# EAGLE board Hot_Plate (EAGLE 5.11)
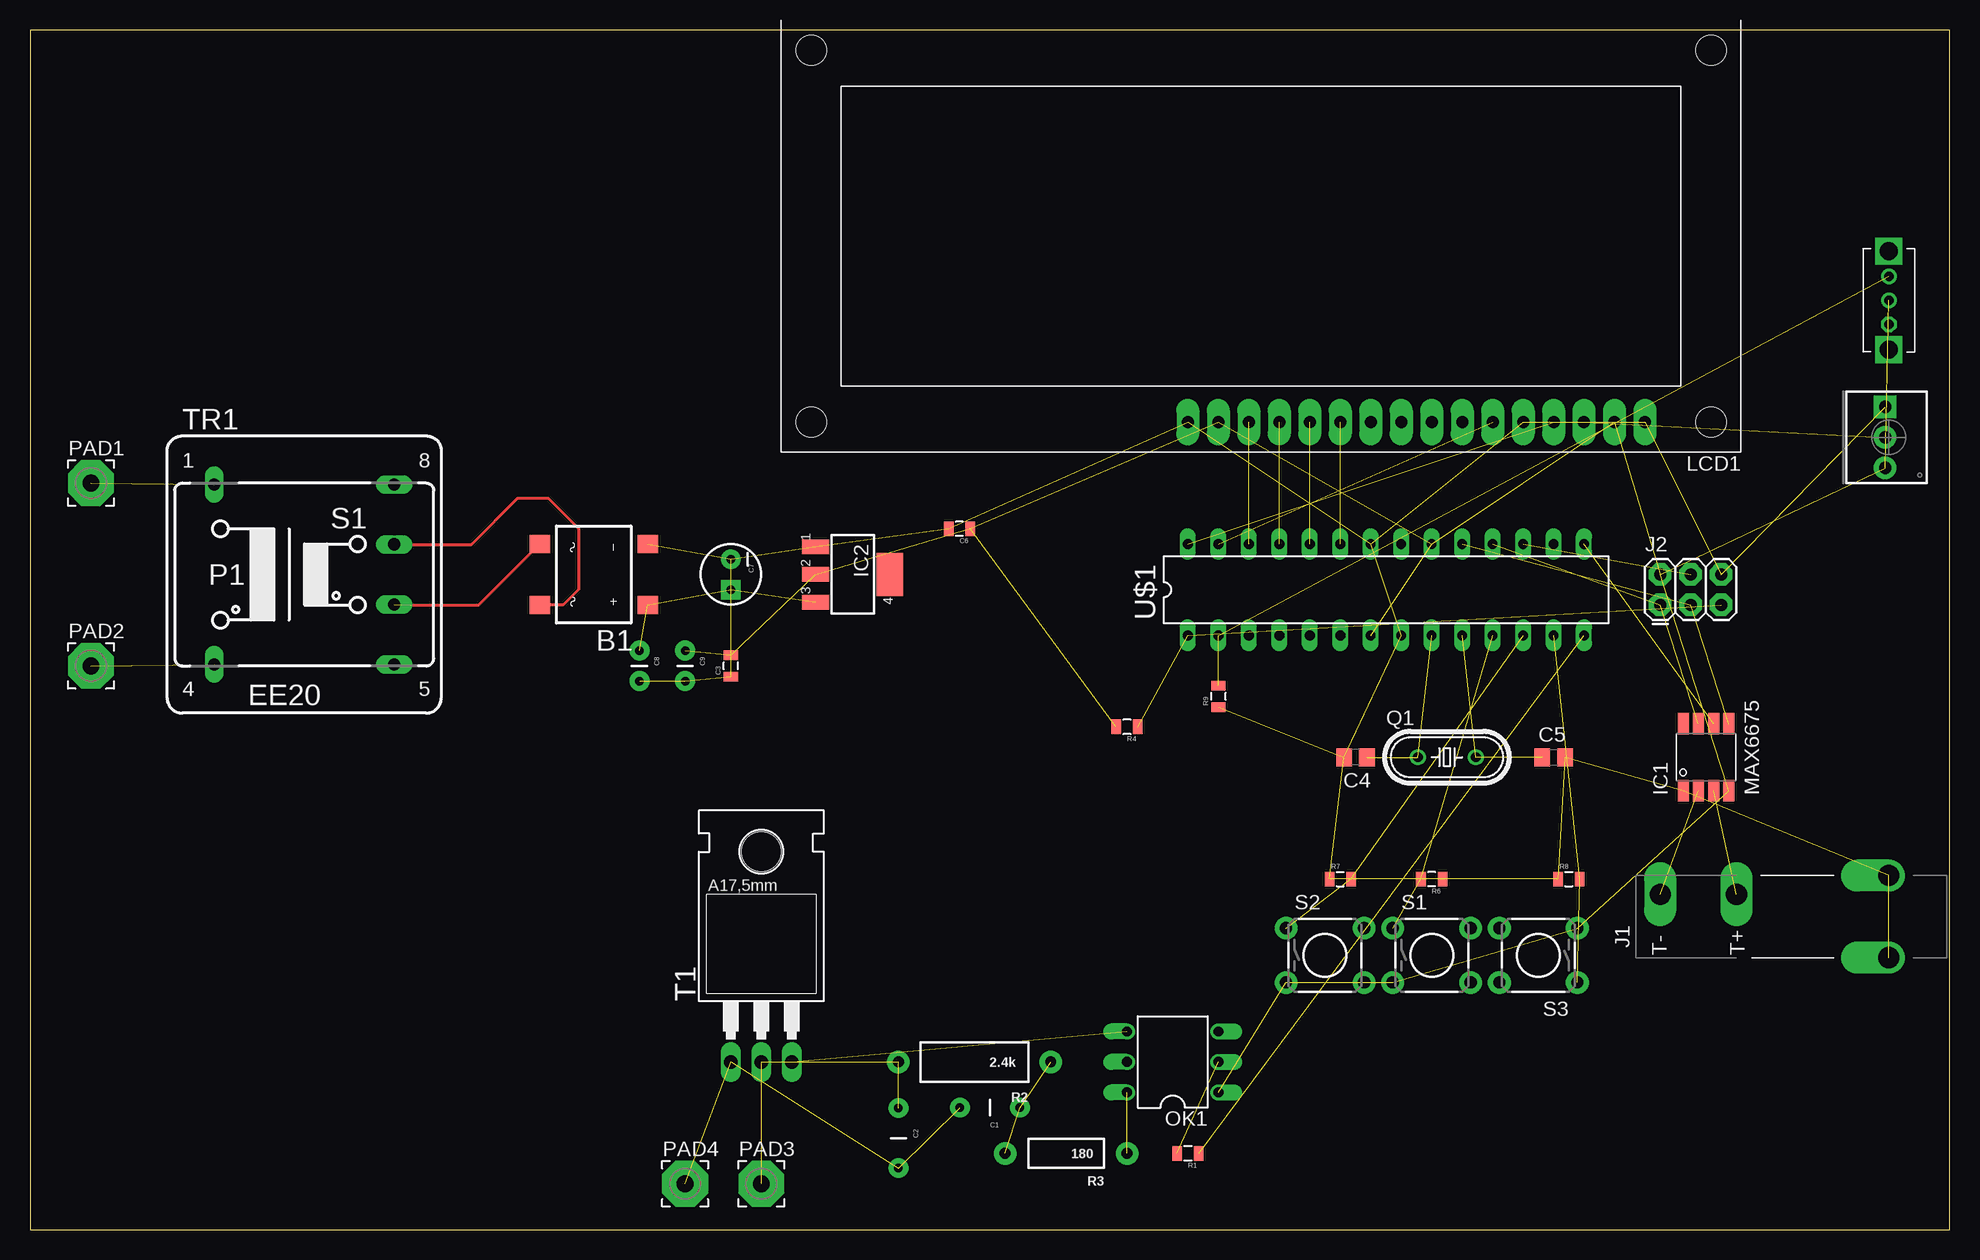
[diagram p0: board, top side]

Size 160 x 100 mm. Coordinates in mm from the lower left corner, seen from the top.
Outline: 0,0 160,0 160,100 0,100 0,0
Copper layers (1*16): Top 0.035mm / dielectric 1.5mm / Bottom 0.035mm
Design rules "default": minimum track width 10mil, minimum drill 24mil, track to track 8mil, track to pad 8mil, pad to pad 8mil, via to via 8mil, smd to smd 8mil, copper to edge 40mil, drill to drill 8mil, minimum pad ring 10mil, minimum via ring 8mil, stop-mask expansion 4mil, vias tented up to drill 0mil, thermal gap 10mil
Net classes: 1 ac_power: width 0.762 mm; 2 power: width 0.305 mm

## Footprints (pad centres in the part's own frame; a part is rotated, then mirrored left to right if it is on the bottom)
DFS = smd 1.5 x 1.7: + -2.55,-4.5; - 2.55,-4.5; AC1 -2.55,4.5; AC2 2.55,4.5
CAP-PTH-5MM = drill 0.7 pad 1.651 round: 1 -2.5,0; 2 2.5,0
0805 = smd 0.8 x 1.2: 1 -0.9,0; 2 0.9,0
C0805 = smd 1.3 x 1.5: 1 -0.95,0; 2 0.95,0
CPOL-RADIAL-10UF-25V = drill 0.7 pad 1.651 square: 1 1.27,0 | drill 0.7 pad 1.651 round: 2 -1.27,0
CAP-PTH-SMALL = drill 0.7 pad 1.651 round: 1 0,0; 2 2.54,0
SOIC-8 = smd 1.778 x 0.914: CS 2.794,-0.635; GND -2.794,1.905; NC 2.794,1.905; SCK 2.794,-1.905; SO 2.794,0.635; T+ -2.794,-0.635; T- -2.794,0.635; VCC -2.794,-1.905
SOT223 = smd 1.219 x 2.235: 1 -2.311,-3.099; 2 0,-3.099; 3 2.311,-3.099 | smd 3.6 x 2.2: 4 0,3.099
TC_JACK = drill 1.778 offset: P$1 -5.283,0; P$2 1.575,0 | drill 1.778 long: T+ 0,12.7; T- 0,19.05
2X3 = drill 1.016 pad 1.88 octagon: 1 0,0; 2 0,2.54; 3 2.54,0; 4 2.54,2.54; 5 5.08,0; 6 5.08,2.54
HY-1602F = drill 1 pad 1.93 long: 1 2.54,0; 2 5.08,0; 3 7.62,0; 4 10.16,0; 5 12.7,0; 6 15.24,0; 7 17.78,0; 8 20.32,0; 9 22.86,0; 10 25.4,0; 11 27.94,0; 12 30.48,0; 13 33.02,0; 14 35.56,0; 15 38.1,0; 16 40.64,0 | hole 2.5: -2.96,0; 72.04,0; -2.96,-31; 72.04,-31
DIL06 = drill 0.813 offset: 1 -2.54,-3.81; 2 0,-3.81; 3 2.54,-3.81; 4 2.54,3.81; 5 0,3.81; 6 -2.54,3.81
3,81/1,4 = drill 1.397 pad 3.81 octagon: 1 0,0
HC49/S = drill 0.813 round: 1 -2.413,0; 2 2.413,0
SPARKFUN_0805 = smd 0.8 x 1.2: 1 -0.9,0; 2 0.9,0
AXIAL-0.5 = drill 0.9 pad 1.88 round: P$1 -6.35,0; P$2 6.35,0
AXIAL-0.4 = drill 0.9 pad 1.88 round: P$1 -5.08,0; P$2 5.08,0
3362U-2 = drill 1.016 pad 1.88 square: 1 -2.54,-0.305 | drill 1.016 pad 1.88 round: 2 0,-0.305; 3 2.54,-0.305
TACTILE-PTH = drill 1.016 pad 1.88 round: 1 -3.251,2.261; 2 3.251,2.261; 3 -3.251,-2.261; 4 3.251,-2.261
SWITCH_OS102011MS2QN1 = drill 1.499 pad 1.524 square: GND -4.102,0; GND1 4.102,0 | drill 0.787 octagon: P$1 -2.007,0 | drill 0.787 round: P$2 0,0; P$3 2.007,0
TO220AB = drill 1.118 long: 1 -2.54,-6.35; 2 0,-6.35; 3 2.54,-6.35 | hole 3.302: 0,11.176
EE20-1 = drill 1.016 long: 1 -7.493,7.493; 4 -7.493,-7.493; 5 7.493,-7.493; 6 7.493,-2.515; 7 7.493,2.515; 8 7.493,7.493
DIL28-3 = drill 0.813 long: 1 -15.24,-3.81; 2 -12.7,-3.81; 3 -10.16,-3.81; 4 -7.62,-3.81; 5 -5.08,-3.81; 6 -2.54,-3.81; 7 0,-3.81; 8 2.54,-3.81; 9 5.08,-3.81; 10 7.62,-3.81; 11 10.16,-3.81; 12 12.7,-3.81; 13 15.24,-3.81; 14 17.78,-3.81; 15 17.78,3.81; 16 15.24,3.81; 17 12.7,3.81; 18 10.16,3.81; 19 7.62,3.81; 20 5.08,3.81; 21 2.54,3.81; 22 0,3.81; 23 -2.54,3.81; 24 -5.08,3.81; 25 -7.62,3.81; 26 -10.16,3.81; 27 -12.7,3.81; 28 -15.24,3.81

## Placement (x,y rotation side)
B1  DF01S  [DFS]  46.99,54.61 90 top
C1  0.1uF  [CAP-PTH-5MM]  80.01,10.16 180 top
C2  [CAP-PTH-5MM]  72.39,7.62 270 top
C3  0.1uF  [0805]  58.42,46.99 90 top
C4  22pF  [C0805]  110.49,39.37 180 top
C5  22pF  [C0805]  127,39.37 0 top
C6  .1uF  [0805]  77.47,58.42 180 top
C7  10uF  [CPOL-RADIAL-10UF-25V]  58.42,54.61 270 top
C8  1uF  [CAP-PTH-SMALL]  50.8,48.26 270 top
C9  0.1uF  [CAP-PTH-SMALL]  54.61,48.26 270 top
IC1  MAX6675  [SOIC-8]  139.7,39.37 90 top
IC2  LM1117-5V  [SOT223]  68.58,54.61 270 top
J1  TC_JACK  [TC_JACK]  154.94,27.94 90 top
J2  [2X3]  135.89,52.07 0 top
LCD1  LCD_2X16  [HY-1602F]  137.16,67.31 180 top
OK1  MOC3010M  [DIL06]  95.25,13.97 90 top
PAD1  WIREPAD3,81/1,4  [3,81/1,4]  5.08,62.23 0 top
PAD2  WIREPAD3,81/1,4  [3,81/1,4]  5.08,46.99 0 top
PAD3  WIREPAD3,81/1,4  [3,81/1,4]  60.96,3.81 0 top
PAD4  WIREPAD3,81/1,4  [3,81/1,4]  54.61,3.81 0 top
Q1  16Mhz  [HC49/S]  118.11,39.37 0 top
R1  220  [SPARKFUN_0805]  96.52,6.35 180 top
R2  2.4k  [AXIAL-0.5]  78.74,13.97 180 top
R3  180  [AXIAL-0.4]  86.36,6.35 180 top
R4  10k  [0805]  91.44,41.91 180 top
R5  10K  [3362U-2]  154.94,66.04 270 top
R6  10K  [0805]  116.84,29.21 180 top
R7  10K  [0805]  109.22,29.21 0 top
R8  10K  [0805]  128.27,29.21 0 top
R9  10K  [0805]  99.06,44.45 90 top
S1  [TACTILE-PTH]  116.84,22.86 0 top
S2  [TACTILE-PTH]  107.95,22.86 0 top
S3  [TACTILE-PTH]  125.73,22.86 180 top
S4  HOT/COLD  [SWITCH_OS102011MS2QN1]  154.94,77.47 90 top
T1  BT136  [TO220AB]  60.96,20.32 0 top
TR1  110V/12V  [EE20-1]  22.86,54.61 0 top
U$1  ARDUINO168-P  [DIL28-3]  111.76,53.34 0 top

## Library data of the parts
B1 = rectifier
C1-C3 C6-C9 J2 R2 R3 R5 S1-S3 = SparkFun
C4 C5 = rcl
IC1 J1 = Thermocouple
IC2 = v-reg-3
LCD1 = lcd_2x16_led_backlight
OK1 = optocoupler; DIGIKEY_LINK: http://parts.digikey.com/1/parts/503860-optocoupler-triac-out-6-dip-moc3010m.html; MF: FAIRCHILD SEMICONDUCTOR; MPN: MOC3010-M; OC_FARNELL: 1505423; OC_NEWARK: 72K8892
PAD1-PAD4 = wirepad
Q1 = crystal; OC_FARNELL: 1667008; OC_NEWARK: unknown
R1 S4 = Nullspace
R4 R6-R9 = tvbgone-adj
T1 = triac; DIGIKEY_LINK: http://parts.digikey.com/1/parts/991324-triac-600v-4a-to220ab-bt136-600d-127.html
TR1 = trafo
U$1 = AI-1_parts

## Nets
12V+: B1.+ C7.1 C8.1 IC2.3
120V [ac_power]: C1.2 C2.2 PAD4.1 T1.1
AREF: U$1.21
CONTROL_INPUT: R1.1 U$1.14
CS: IC1.CS U$1.15
DB4: LCD1.11 U$1.23
DB5: LCD1.12 U$1.24
DB6: LCD1.13 U$1.25
DB7: LCD1.14 U$1.26
GND [power]: B1.- C3.1 C4.2 C5.2 C6.2 C7.2 C8.2 C9.2 IC1.GND IC2.1 J1.P$1 J1.P$2 J2.6 LCD1.1 LCD1.5 LCD1.16 R5.1 R6.1 R7.1 R8.1 R9.1 U$1.8 U$1.22
LCD_ENABLE: LCD1.6 U$1.27
MISO: IC1.SO J2.1 U$1.18
MOSI: J2.4 U$1.17
N$1: OK1.2 R1.2
N$3: OK1.6 R3.P$1
N$4: C1.1 R2.P$1 R3.P$2
N$5: OK1.4 T1.3
N$6: LCD1.3 R5.2
N$7: U$1.3
N$8: U$1.4
N$9: U$1.5
N$10: U$1.6
N$12: B1.AC2 TR1.6
N$13: B1.AC1 TR1.7
ON_OFF: R9.2 S4.P$3 U$1.2
OUT [ac_power]: C2.1 PAD3.1 R2.P$2 T1.2
RESET: J2.5 R4.1 U$1.1
RS: LCD1.4 U$1.28
SCK: IC1.SCK J2.3 U$1.19
SS: U$1.16
SWITCH_1: R6.2 S1.1 U$1.11
SWITCH_2: R7.2 S2.1 U$1.12
SWITCH_3: R8.2 S3.1 U$1.13
T+: IC1.T+ J1.T+
T-: IC1.T- J1.T-
VAC+ [ac_power]: PAD1.1 TR1.1
VAC- [ac_power]: PAD2.1 TR1.4
VCC [power]: C3.2 C6.1 C9.1 IC1.VCC IC2.2 J2.2 LCD1.2 LCD1.15 OK1.1 R4.2 R5.3 S1.3 S2.3 S3.3 S4.P$2 U$1.7 U$1.20
XTAL1: C4.1 Q1.1 U$1.9
XTAL2: C5.1 Q1.2 U$1.10

## Tracks (layer width: path | path; a pad name or v marks a point on that pad's centre or on a via)
12V+  (3 unrouted)
120V  (3 unrouted)
CONTROL_INPUT  (1 unrouted)
CS  (1 unrouted)
DB4  (1 unrouted)
DB5  (1 unrouted)
DB6  (1 unrouted)
DB7  (1 unrouted)
GND  (22 unrouted)
LCD_ENABLE  (1 unrouted)
MISO  (2 unrouted)
MOSI  (1 unrouted)
N$1  (1 unrouted)
N$3  (1 unrouted)
N$4  (2 unrouted)
N$5  (1 unrouted)
N$6  (1 unrouted)
N$12  (1 unrouted)
  Top 0.254: B1.AC2 37.4,52.07 31.75,52.07
N$13
  Top 0.254: TR1.7 36.8,57.12 40.64,60.96 43.18,60.96 45.72,58.42 45.72,53.34 44.45,52.07 B1.AC1
ON_OFF  (2 unrouted)
OUT  (3 unrouted)
RESET  (2 unrouted)
RS  (1 unrouted)
SCK  (2 unrouted)
SWITCH_1  (2 unrouted)
SWITCH_2  (2 unrouted)
SWITCH_3  (2 unrouted)
T+  (1 unrouted)
T-  (1 unrouted)
VAC+  (1 unrouted)
VAC-  (1 unrouted)
VCC  (16 unrouted)
XTAL1  (2 unrouted)
XTAL2  (2 unrouted)